# Altium PCB STM32F103C8T6核心板.PcbDoc
Units mil, origin at the board's own origin, x right, y up, seen from the top; angles counter-clockwise.
Board outline 2100 x 900 mil, 2 copper layers (Top Layer, Bottom Layer); 35 components, 50 nets, 170 pads, 27 vias.
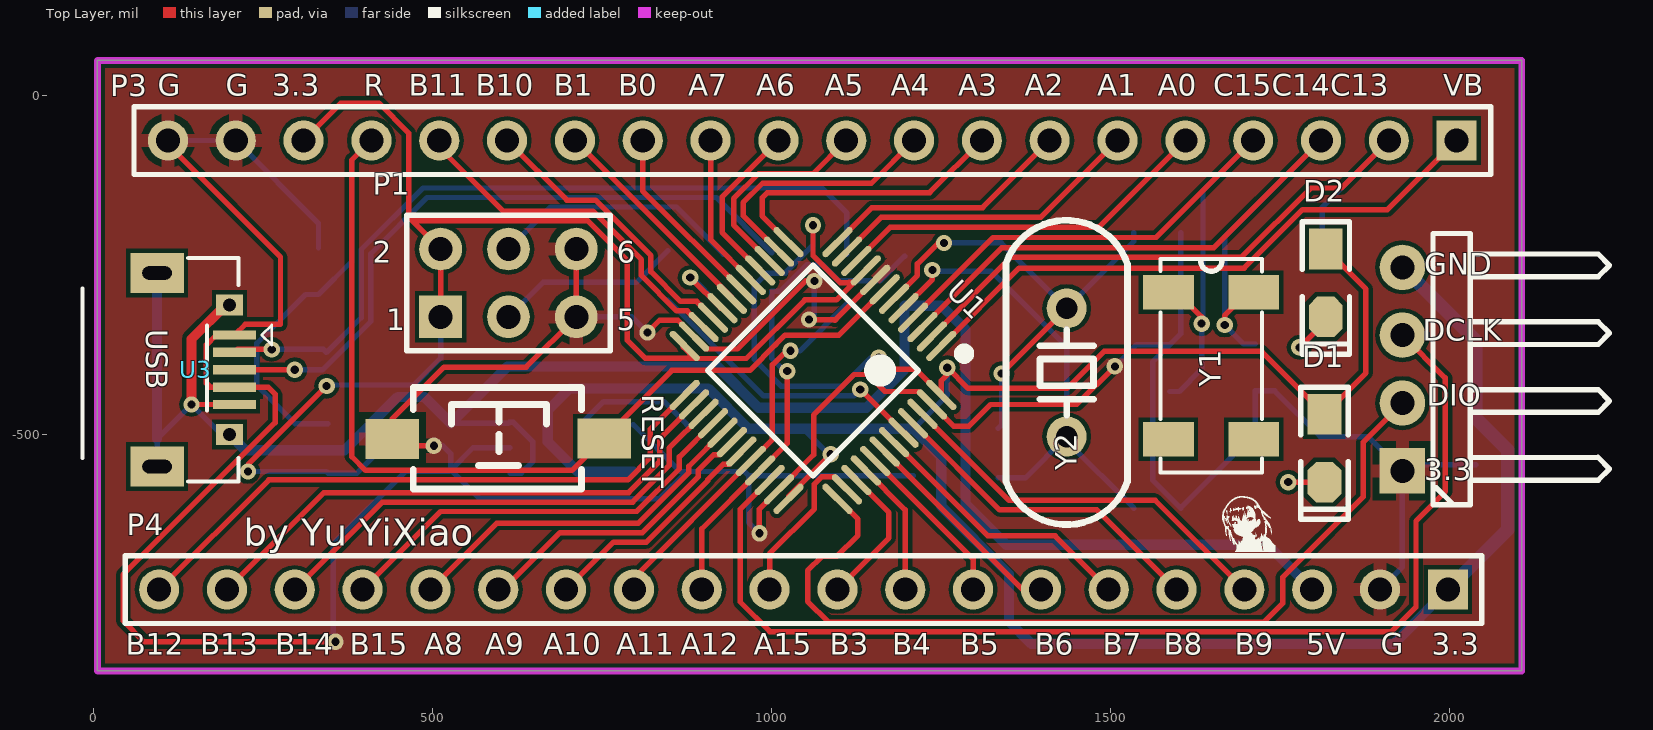
[diagram p0: Top Layer view]
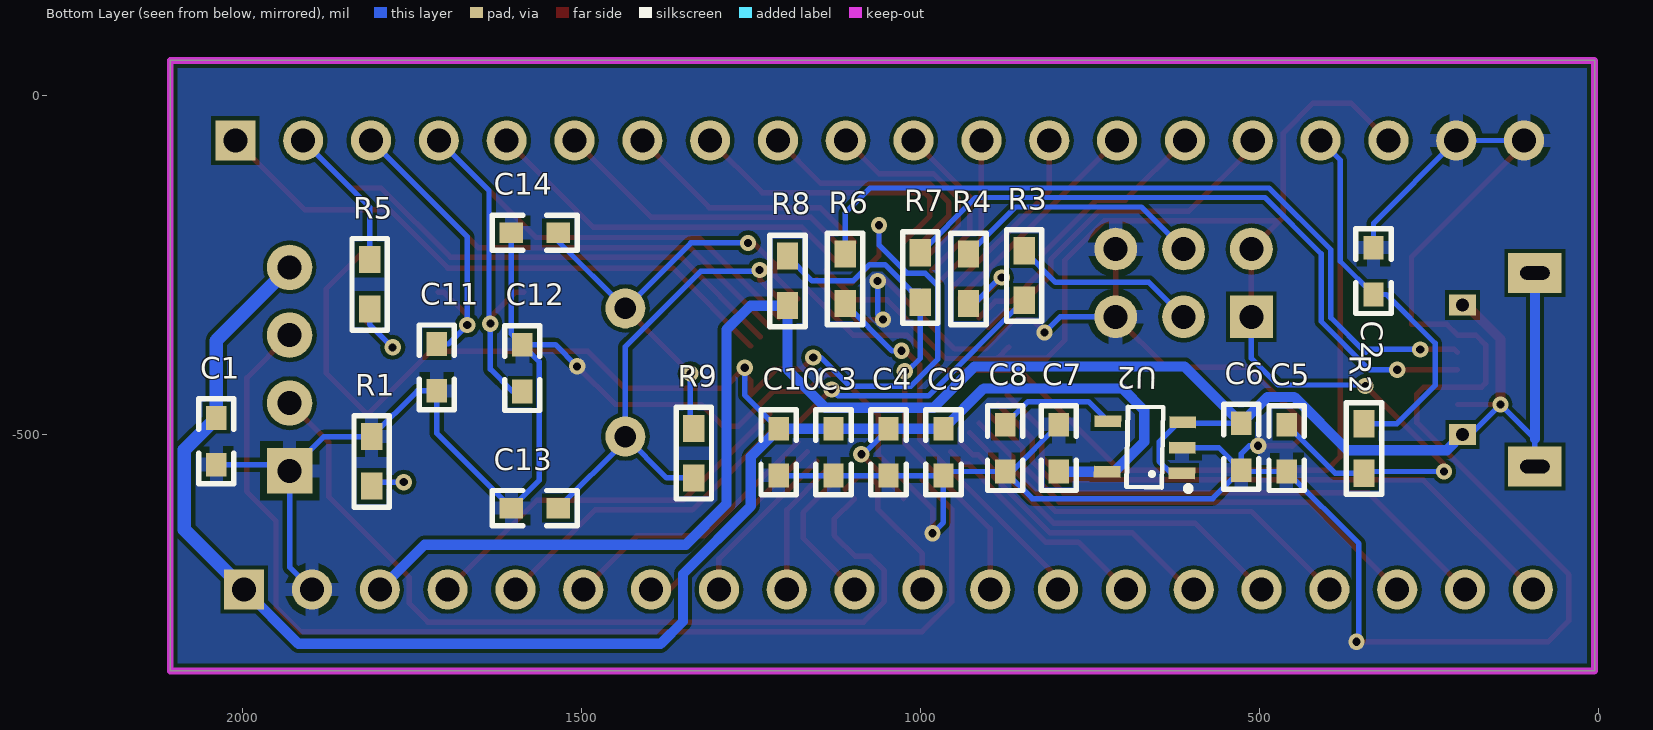
[diagram p1: Bottom Layer view, seen from below]

## Layer stack, top to bottom
Top Solder: solder mask 0.4, Solder Resist, Dk 3.5
Top Layer: signal copper 1.4
Dielectric1: dielectric 12.6, FR-4, Dk 4.8
Bottom Layer: signal copper 1.4
Bottom Solder: solder mask 0.4, Solder Resist, Dk 3.5

## Board outline
788,-848 2106,-848 2106,-146 2106,52 7,52 6,52 6,23 6,-848 337,-848

## Design rules (kind name [scope] priority, off if disabled: settings)
Clearance [All] p1: gap=6 ignorepadtopadclearanceinfootprint=FALSE except(0: Arc-Hole Track-Hole SMDPad-Hole THPad-Hole Via-Hole Fill-Hole Poly-Hole Region-Hole Text-Hole)
FabricationTestPointUsage TestPointUsage [All] p1: valid=0 allowmultiple=FALSE
FabricationTestpoint Testpoint [(IsPad And (OnTopLayer Or OnBottomLayer))] p1: side=3 testpointundercomponent=TRUE minsize=40 maxsize=100 preferedsize=60 minholesize=0 maxholesize=40 preferedholesize=32 testpointgrid=1 allowsidetop=TRUE allowsidebottom=TRUE usegrid=TRUE gridtolerance=0.01
HoleToHoleClearance [All] p1: gap=0 allowstackedmicrovias=TRUE
MinimumSolderMaskSliver [All] p1: minsoldermaskwidth=0
PolygonConnect PolygonConnect_1 [All vs (InPadClass('All Pads'))] p1: connectstyle=Relief reliefconductorwidth=20 reliefentries=4 polygonreliefangle="90 Angle" airgapwidth=10
PolygonConnect [All] p2: connectstyle=Direct reliefconductorwidth=20 reliefentries=4 polygonreliefangle="90 Angle" airgapwidth=10
RoutingVias [All] p1: holewidth=12 width=24 viastyle="Through Hole" minholewidth=12 minwidth=24 maxholewidth=50 maxwidth=100
SilkToSilkClearance [All] p1: silktosilkclearance=0
SilkToSolderMaskClearance SilkscreenOverComponentPads [IsPad] p1: minsilkscreentomaskgap=0 clearancetoexposedcopper=TRUE
SolderMaskExpansion [All] p1: expansion=4 istentingtop=FALSE
Width [All] p1: maxlimit=20 minlimit=6 preferedwidth=8
24 further rules are at their usual default settings.

## Components (designator, comment, footprint, x,y, rotation, side; value= is the part's Value field where it differs from the comment)
C1 "104,0603" "C 0603" 2038,-509 r90 bottom
C2 "105,0603" "C 0603" 332,-259 r270 bottom
C3 "105,0603" "C 0603" 1128,-525 r90 bottom
C4 "105,0603" "C 0603" 1047,-525 r90 bottom
C5 "106,0603" "C 0603" 460,-520 r270 bottom
C6 "105,0603" "C 0603" 527,-517 r90 bottom
C7 "104,0603" "C 0603" 796,-520 r270 bottom
C8 "223,0603" "C 0603" 875,-519 r90 bottom
C9 "105,0603" "C 0603" 966,-525 r90 bottom
C10 "105,0603" "C 0603" 1209,-525 r90 bottom
C11 "22P,0603" "C 0603" 1713,-401 r270 bottom
C12 "22P,0603" "C 0603" 1587,-401 r90 bottom
C13 "22P,0603" "C 0603" 1569,-608 r0 bottom
C14 "22P,0603" "C 0603" 1569,-202 r0 bottom
D1 "LED" "LED 0805G" 1815,-519.68 r270 top
D2 "LED" "LED 0805G" 1817,-276 r270 top
P1 "Header 3X2" HDR-3X2 512,-326 r0 top
P2 "SWD" HDR-1X4_H 1930,-553 r90 top
P3 "Header 20" HDR1X20 2010,-66 r180 top
P4 "Header 20" HDR1X20 1997,-728 r180 top
R1 "510R,0603" "R 0603" 1809,-539 r90 bottom
R2 "10K,0603" "R 0603" 346,-520 r270 bottom
R3 "10K,0603" "R 0603" 847,-265 r90 bottom
R4 "10K,0603" "R 0603" 929,-270 r270 bottom
R5 "510R,0603" "R 0603" 1812,-278 r90 bottom
R6 "20R,0603" "R 0603" 1111,-270 r270 bottom
R7 "20R0603" "R 0603" 1000,-268 r270 bottom
R8 "4.7K,0603" "R 0603" 1196,-273 r90 bottom
R9 "1M0603" "R 0603" 1334,-527 r270 bottom
RESET "SW-PB_V" "TSW SMD-3*6*2.5" 598,-505 r0 top (schematic designator SW1)
U1 "STM32F103C8T6" "TQFP48 7x7_L" 1061,-405 r135 top locked
U2 "RT9193" SOT23-5L 669,-518 r91 bottom
U3 "USB-mrico" USB-micro_B 94,-404 r270 top
Y1 "32.768K" MC-306 1648,-398 r270 top
Y2 "8M" "XTAL-49S DIP" 1435,-408 r270 top

## Footprints (in the part's own frame and the unit in brackets; to place one, negate y for a bottom-side part, rotate by r counter-clockwise, add the part's x,y. Pads: shape width x height; smd on the part's side, far side on the other; paste and mask are expansions set on the pad)
"C 0603" [mil] "无极性贴片电容"
  rect 35x30 smd: 1(-35,0) 2(34,0)
  silkscreen extent -63,-26 62,26, body extent -31,-16 31,16, height 32
HDR1X20 [mm] "Connector; Header; 20 Position"
  rect 1.5x1.5 hole 0.9: 1(0,0)
  round 1.5 hole 0.9: 2(2.54,0) 3(5.08,0) 4(7.62,0) 5(10.16,0) 6(12.7,0) 7(15.24,0) 8(17.78,0) 9(20.32,0) 10(22.86,0) 11(25.4,0) 12(27.94,0) 13(30.48,0) 14(33.02,0) 15(35.56,0) 16(38.1,0) 17(40.64,0) 18(43.18,0) 19(45.72,0) 20(48.26,0)
  silkscreen extent -1.27,-1.27 49.53,1.27
HDR-1X4_H [mm] "弯脚排针，4脚"
  rect 1.7x1.7 hole 0.9: 1(0,0)
  round 1.7 hole 0.9: 2(2.54,0) 3(5.08,0) 4(7.62,0)
  silkscreen extent -1.27,-7.76 8.89,-1.14, body extent -1.27,-7.77 8.89,1.27, height 4.85
HDR-3X2 [mm] "双排排针，3x2脚"
  rect 1.6x1.6 hole 0.9: 1(0,0)
  round 1.6 hole 0.9: 2(0,2.54) 3(2.54,0) 4(2.54,2.54) 5(5.08,0) 6(5.08,2.54)
  silkscreen extent -1.27,-1.27 6.35,3.81, body extent -1.27,-1.27 6.35,3.81, height 8.5
"LED 0805G" [mil] "绿色0805LED"
  rect 60x50 smd: 1(-50,0)
  oct 60x50 smd: 2(50,0)
  silkscreen extent -90,-35 105,35, body extent -39,-25 39,25, height 32
MC-306 [mm]
  rect 1.3x1.9 smd: 1(-2.75,-1.6) 2(2.75,-1.6) 3(2.75,1.6) 4(-2.75,1.6)
  silkscreen extent -4,-1.9 4,1.9
"R 0603" [mil] "1/10W贴片电阻"
  rect 40x31.5 smd: 1(-36.5,0) 2(36.5,0)
  silkscreen extent -68,-26 68,26, body extent -31,-16 31,16, height 16
SOT23-5L [mm] "3x1.6x1.1mm(长宽高)"
  rect 0.45x1 smd: 1(-0.95,-1.4) 2(0,-1.4) 3(0.95,-1.4) 4(0.95,1.4) 5(-0.95,1.4)
  silkscreen extent -1.6,-1.73 1.5,0.66, body extent -1.5,-1.4 1.5,1.4, height 1.15
"TQFP48 7x7_L" [mm] "48脚，体宽：7x7mm, 脚距：0.5mm"
  oval 0.25x1.5 smd: 1(-2.75,-4.046) 2(-2.25,-4.046) 3(-1.75,-4.046) 4(-1.25,-4.046) 5(-0.75,-4.046) 6(-0.25,-4.046) 7(0.25,-4.046) 8(0.75,-4.046) 9(1.25,-4.046) 10(1.75,-4.046) 11(2.25,-4.046) 12(2.75,-4.046) 25(2.75,4.046) 26(2.25,4.046) 27(1.75,4.046) 28(1.25,4.046) 29(0.75,4.046) 30(0.25,4.046) 31(-0.25,4.046) 32(-0.75,4.046) 33(-1.25,4.046) 34(-1.75,4.046) 35(-2.25,4.046) 36(-2.75,4.046)
  oval 1.5x0.25 smd: 13(4.046,-2.75) 14(4.046,-2.25) 15(4.046,-1.75) 16(4.046,-1.25) 17(4.046,-0.75) 18(4.046,-0.25) 19(4.046,0.25) 20(4.046,0.75) 21(4.046,1.25) 22(4.046,1.75) 23(4.046,2.25) 24(4.046,2.75) 37(-4.046,2.75) 38(-4.046,2.25) 39(-4.046,1.75) 40(-4.046,1.25) 41(-4.046,0.75) 42(-4.046,0.25) 43(-4.046,-0.25) 44(-4.046,-0.75) 45(-4.046,-1.25) 46(-4.046,-1.75) 47(-4.046,-2.25) 48(-4.046,-2.75)
  silkscreen extent -3.68,-4.57 2.79,2.79, body extent -4.5,-4.5 4.5,4.5, height 1.05
"TSW SMD-3*6*2.5" [mm] "3*6*2.5mm"
  rect 2x1.5 smd: 1(-3.996,-0.02) 2(3.937,0)
  silkscreen extent -3.21,-1.9 3.09,1.9, body extent -4,-1.88 4,1.62, height 2.59
USB-micro_B [mm] "micro型USB ，5.7*7.8*2.5mm"
  rect 0.35x1.6 smd: 1(-1.3,2.9) 2(-0.65,2.9) 3(0,2.9) 4(0.65,2.9) 5(1.3,2.9)
  rect 1.5x2 hole 0.5 slot 1.1 at 90 deg: 5(-3.625,0) 5(3.625,0)
  rect 0.8x1 hole 0.5: 5(-2.425,2.71) 5(2.425,2.71)
  silkscreen extent -4.19,-2.79 4.19,4.3, body extent -4,-2.71 4,2.89, height 2.8
"XTAL-49S DIP" [mm]
  round 1.5 hole 0.8: 1(-2.4,0) 2(2.4,0)
  silkscreen extent -5.7,-2.28 5.7,2.28, body extent -5.68,-2.35 5.68,2.3, height 3.5

## Part data
C1 C2 C3 C4 C5 C6 C7 C8 C9 C10 C11 C12 C13 C14: library part Cap, "Capacitor"
P1: "Header, 3-Pin, Dual row"
P2: library part "Header 4", "Header, 4-Pin"
P3 P4: "Header, 20-Pin"
R1 R2 R3 R4 R5 R6 R7 R8 R9: library part Res2, "Resistor"
RESET: "SWITCH"
U2: library part RT9193X_5P
U3: library part usb-STM
Y1 Y2: library part XTAL, "Crystal Oscillator"

## Via types
v1: diameter 24, hole 12, Top Layer to Bottom Layer, 27 vias

## Nets (pads, with @x,y where several pads share a name; then routed paths per layer and width w, separated by ;. In a path a pad name is that pad's centre, name@x,y a point inside that pad or via, vN(x,y) a via of type N, cw(c..) or ccw(c..) an arc to the next point about the centre after c; other vN are vias at no path point)
5V: C6.2 P4.3 R8.1 U2.1 U2.3 U3.5 | length 3027.2
  Top Layer w8: v1(144.82,-455.18) U3.5@208.17,-455.18
  Top Layer w15: v1(144.82,-455.18) 144.82,-358.7 194.99,-308.53 U3.5@200.69,-308.53
  Bottom Layer w8: U3.5@94,-546.72 94,-506 v1(144.82,-455.18) 189.11,-499.47 U3.5@200.69,-499.47 ; C6.2 611.8,-483 U2.3 619.37,-481.57 648,-510.2 648,-539 630.64,-556.36 U2.1
  Bottom Layer w15: 94,-506 U3.5@94,-261.28 ; U3.5@200.69,-499.47 223.94,-522.72 370.28,-522.72 449,-444 488,-444 C6.2 611,-399 919.75,-399 980.75,-460 1139.82,-460 1196,-403.82 R8.1 1250.5,-309.5 1286,-345 1286,-602 1346,-662 1731,-662 P4.3
BOOT0: R3.1 U1.44 | length 436.3
  Top Layer w8: v1(1130.76,-433) U1.44
  Bottom Layer w8: R3.1 988,-442.5 1121.26,-442.5 v1(1130.76,-433)
BOOT1: R4.2 U1.20 | length 134.7
  Top Layer w8: v1(880,-268) 925.24,-313.24 U1.20
  Bottom Layer w8: v1(880,-268) 882.5,-268 922,-307.5 924.87,-310.48 R4.2@929,-314.76
GND: C1.1 C2.1 C3.1 C4.1 C5.2 C6.1 C7.1 C8.1 C9.1 C10.1 C11.2 C12.2 C13.2 C14.2 P1.5 P1.6 P2.1 P3.19 P3.20 P4.2 R1.2 RESET.1 U1.8 U1.23 U1.35 U1.47 U2.2 U3.1 U3.4 | length 6328.7
  Top Layer w8: P3.20 110,-72 276,-238 276,-337 223.99,-337 U3.1 181.24,-352.82 166.68,-367.38 166.68,-423.68 172.59,-429.59 U3.4 257.59,-429.59 268,-440 268,-482 44,-706 44,-774 75,-805 v1(357,-805) ; v1@501,-517 v1(502,-516) 452.9,-516 451.9,-517 RESET.1 440.69,-476.31 517,-400 638,-400 P1.5 P1.6 ; v1(817,-349) 835,-331 861.73,-331 U1.23 904.13,-373.4 949.6,-373.4 1050,-273 v1(1063,-273) ; v1(982,-645) 982,-609.27 U1.35 1062,-529.27 1062,-470.65 1121.65,-411 1142,-411 1167,-436 1217.28,-436 U1.47 1268.28,-487 1291,-487 1322.82,-455.18 1449.82,-455.18 v1(1506,-399) ; v1(1055,-330) 1094.24,-330 ; 1093.24,-331 1094.24,-330 ; U1.8 1094.24,-330
  Bottom Layer w8: P3.20 P3.19 332,-188 C2.1 ; v1(357,-805) 353.54,-801.54 353.54,-660.46 C5.2 525,-554 C6.1 ; v1(502,-516) 515,-516 527,-528 C6.1 ; U2.2 560.04,-518.96 C6.1 ; P1.5 794,-326 v1(817,-349) ; C7.1 865,-554 C8.1 ; v1(982,-645) 966,-629 C9.1 ; v1(1055,-330) 1063,-322 v1(1063,-273) ; C10.1 C3.1 C4.1 C9.1 ; v1(1506,-399) 1538,-367 C12.2 ; C14.2 1603,-351 C12.2 ; P4.2 1930,-695 P2.1 ; C1.1 1939,-544 P2.1 ; C6.1 569,-594 835,-594 C8.1 ; C8.1 960,-554 C9.1 ; C12.2 1562,-392 1562,-567 C13.2 1713,-498 C11.2 1741.5,-435 R1.2 1879.5,-502.5 P2.1
NetC8_2: C8.2 U2.4 | length 177.5
  Bottom Layer w8: U2.4 752.1,-451 841,-451 C8.2
NetD1_2: D1.2 R1.1 | length 103.1
  Top Layer w8: v1(1761.68,-569.68) D1.2
  Bottom Layer w8: v1(1761.68,-569.68) 1803.18,-569.68 R1.1
NetD2_2: D2.2 R5.1 | length 131.7
  Top Layer w8: v1(1778,-371) 1817,-332 D2.2
  Bottom Layer w8: v1(1778,-371) 1812,-337 R5.1
NetP1_3: P1.3 R3.2 | length 275.4
  Bottom Layer w8: P1.3 663,-275 800.5,-275 R3.2
NetP1_4: P1.4 R4.1 | length 371.5
  Bottom Layer w8: P1.4 674,-164 859.5,-164 R4.1
NetR6_1: R6.1 U3.2 | length 1141.3
  Top Layer w8: U3.2 212.58,-374 v1(263,-374)
  Bottom Layer w8: v1(263,-374) 339.18,-374 343.59,-378.41 395,-327 395,-227 486,-136 1074,-136 1111,-173 R6.1
NetR7_1: R7.1 U3.3 | length 989.3
  Top Layer w8: U3.3 v1(297,-404)
  Bottom Layer w8: v1(297,-404) 337.8,-404 409,-332.8 409,-233 492,-150 918.5,-150 R7.1
OSCIN: C13.1 R9.2 U1.5 Y2.2 | length 723.1
  Top Layer w8: U1.5 1237,-270.76 v1(1237,-257)
  Bottom Layer w8: v1@1237,-259 1324,-259 1435,-370 Y2.2 ; R9.2 1373.99,-563.5 Y2.2 ; C13.1 1435,-509 Y2.2
OSCOUT: C14.1 R9.1 U1.6 Y2.1 | length 709.8
  Top Layer w8: U1.6 1215,-264.92 1215,-247.89 1245.89,-217 v1(1254,-217) ; v1(1339,-409.51) Y2.1
  Bottom Layer w8: v1(1254,-217) 1338.49,-217 Y2.1 1534,-214.51 C14.1 ; R9.1 1339,-485.5 v1(1339,-409.51)
PA0: P3.5 U1.10 | length 558.7
  Top Layer w8: U1.10 1174.56,-194 1482,-194 P3.5
PA1: P3.6 U1.11 | length 466.8
  Top Layer w8: U1.11 1161.73,-179 1397,-179 P3.6
PA2: P3.7 U1.12 | length 375
  Top Layer w8: U1.12 1147.89,-165 1311,-165 P3.7
PA3: P3.8 U1.13 | length 440.3
  Top Layer w8: U1.13 986.06,-176.94 986.06,-150.66 993.72,-143 1233,-143 P3.8
PA4: P3.9 U1.14 | length 384
  Top Layer w8: U1.14 958,-176.73 958,-157.6 986.6,-129 1147,-129 P3.9
PA5: P3.10 U1.15 | length 315.4
  Top Layer w8: U1.15 944,-190.56 944,-151.8 980.8,-115 1061,-115 P3.10
PA6: P3.11 U1.16 | length 249.2
  Top Layer w8: U1.16 927,-201.4 927,-149 P3.11
PA7: P3.12 U1.17 | length 230
  Top Layer w8: P3.12 910,-212.24 U1.17
PA8: P4.16 U1.29 | length 531.8
  Top Layer w8: P4.16 595,-630 803.71,-630 878,-555.71 878,-546.24 U1.29
PA9: P4.15 U1.30 | length 440
  Top Layer w8: P4.15 604,-728 688,-644 809.51,-644 892,-561.51 892,-552.04 914.96,-529.08 923,-529.08 U1.30
PA10: P4.14 U1.31 | length 343.4
  Top Layer w8: P4.14 767,-658 815.31,-658 906,-567.31 906,-565.88 928.88,-543 936.92,-543 U1.31
PA11: P4.13 R6.2 U1.32 | length 563.1
  Top Layer w8: P4.13 797,-710.76 U1.32 1001,-506.76 1001,-396.89 1021.89,-376 v1(1028,-376)
  Bottom Layer w8: v1(1028,-376) 1041.5,-376 R6.2
PA12: P4.12 R7.2 R8.2 U1.33 | length 741.3
  Top Layer w8: P4.12 897,-638.6 U1.33 1023,-512.6 v1(1023,-406)
  Bottom Layer w8: v1(1023,-406) 1019,-406 1000,-387 R7.2 1000,-288 1013.19,-288 1052.19,-249 1075,-249 1099,-273 1159.5,-273 R8.2
PA15: P4.11 U1.38 | length 242.9
  Top Layer w8: P4.11 997,-675 1063,-609 1063,-572.37 1073.5,-561.87 1092.6,-561.87 U1.38
PB0: P3.13 U1.18 | length 279.6
  Top Layer w8: P3.13 810,-140.08 U1.18
PB1: P3.14 U1.19 | length 329.2
  Top Layer w8: P3.14 941.4,-297.4 U1.19
PB3: P4.10 U1.39 | length 213
  Top Layer w8: P4.10 1173,-652 1173,-614.44 U1.39
PB4: P4.9 U1.40 | length 199.7
  Top Layer w8: U1.40 1197,-610.6 P4.9
PB5: P4.8 U1.41 | length 249.2
  Top Layer w8: U1.41 1297,-682.76 P4.8
PB6: P4.7 U1.42 | length 314.6
  Top Layer w8: U1.42 1370.08,-728 P4.7
PB7: P4.6 U1.43 | length 406.4
  Top Layer w8: U1.43 1318.92,-649 1418,-649 P4.6
PB8: P4.5 U1.45 | length 490.1
  Top Layer w8: U1.45 1336.19,-610.6 1479.6,-610.6 P4.5
PB9: P4.4 U1.46 | length 582
  Top Layer w8: U1.46 1350.03,-596.6 1565.6,-596.6 P4.4
PB10: P3.15 U1.21 | length 425.6
  Top Layer w8: P3.15 698,-154 740.4,-154 822,-235.6 822,-259.2 865.8,-303 889.4,-303 U1.21
PB11: P3.16 U1.22 | length 523.3
  Top Layer w8: P3.16 510,-76 604,-170 736.6,-170 808,-241.4 808,-265 860,-317 875.56,-317 U1.22
PB12: P4.20 U1.25 | length 918
  Top Layer w8: P4.20 258.65,-566.35 788.16,-566.35 821,-533.52 821,-491.89 U1.25
PB13: P4.19 U1.26 | length 821.5
  Top Layer w8: P4.19 340,-585 789.31,-585 835,-539.31 835,-505.73 U1.26
PB14: P4.18 U1.27 | length 724.9
  Top Layer w8: P4.18 426,-599 795.11,-599 849,-545.11 849,-519.56 U1.27
PB15: P4.17 U1.28 | length 628.4
  Top Layer w8: P4.17 512,-613 800.91,-613 864,-549.91 864,-532.4 U1.28
PC13: P3.2 R5.2 U1.2 | length 1009.5
  Top Layer w8: U1.2 1353.27,-238 1693,-238 1795,-136 1840,-136 P3.2
  Bottom Layer w8: R5.2 1812,-164 P3.2
PC14: C11.1 P3.3 U1.3 Y1.4 | length 1160.2
  Top Layer w8: U1.3 1339.44,-224 1652,-224 P3.3 ; v1(1668,-338) 1668,-324 1702.27,-289.73 Y1.4
  Bottom Layer w8: C11.1 1696,-366 v1(1668,-338) 1668,-208 P3.3
PC15: C12.1 P3.4 U1.4 Y1.1 | length 1113
  Top Layer w8: U1.4 1326.6,-209 1567,-209 P3.4 ; Y1.1 1597.73,-289.73 1634,-326 v1(1634,-336)
  Bottom Layer w8: C12.1 1601.11,-436 1634,-403.11 v1(1634,-336) 1636,-334 1636,-140 P3.4
RESET: C2.2 P3.17 R2.1 RESET.2 U1.7 | length 1953.4
  Top Layer w8: P3.17 381,-95 381,-532 401.35,-552.35 705.65,-552.35 RESET.2 853,-405 968,-405 1006,-367 1006,-366.89 1019.89,-353 1099.08,-353 U1.7
  Bottom Layer w8: R2.1 297.5,-483.5 241,-427 241,-364.89 312.89,-293 C2.2 381,-244 381,-95 P3.17
SWDCLK: P2.2 U1.37 | length 1300.4
  Top Layer w8: U1.37 1127,-624.11 1127,-648 1096,-679 1074,-679 1053,-700 1053,-745.47 1083.53,-776 1726,-776 1753.54,-748.46 1753.54,-738.85 1753.54,-710 1872,-591.53 1872,-511 P2.2
SWDIO: P2.3 U1.34 | length 1672.6
  Top Layer w8: U1.34 953.54,-609.9 953.54,-746 997.53,-790 1914,-790 1950,-754 1950,-627 1993.5,-583.5 1993,-583 1993,-416 P2.3
VBAT: P3.1 U1.1 | length 885.3
  Top Layer w8: U1.1 1364.97,-254.14 1696.66,-254.14 1782.8,-168 1908,-168 P3.1
VCC3V3: C1.2 C3.2 C4.2 C5.1 C7.2 C9.2 C10.2 D1.1 D2.1 P1.1 P1.2 P2.4 P3.18 P4.1 R2.2 U1.9 U1.24 U1.36 U1.48 U2.5 | length 6376.1
  Top Layer w8: v1(228,-554) 228,-544 v1(344,-428) ; P3.18 365,-11 421,-11 465,-55 465,-179 470.5,-184.5 ; P1.1 P1.2 470.5,-184.5 ; U1.24@869.96,-370.76 U1.24@886.52,-387.32 ; U1.36 1024.92,-590.65 v1(1087,-528.57) ; v1(1061,-191) 1061,-235.63 1101.34,-275.97 1114.67,-275.97 1114.67,-275 U1.9@1121.4,-275 ; U1.9 U1.9@1121.4,-275 ; v1(1158,-386) 1175,-403 1212.11,-403 U1.48 1250.19,-419.81 1259,-411 v1(1259,-401) 1289.51,-431.51 1435.49,-431.51 1490,-377 1722.32,-377 D1.1 1876,-408.68 1876,-285 D2.1 ; 470.5,-184.5 729.19,-184.5 787,-242.32 787,-360.32 814,-387.32 U1.24@886.52,-387.32 ; U1.24@886.52,-387.32 886.6,-387.4 962.6,-387.4 1049,-301 1095.4,-301 U1.9@1121.4,-275
  Bottom Layer w8: v1(228,-554) 343.5,-554 R2.2 388.5,-556.5 C5.1 ; v1(344,-428) 345.5,-426.5 472.5,-426.5 512,-387 P1.1 ; C4.2 1084.57,-528.57 v1(1087,-528.57) ; v1(1061,-191) 1061,-220.39 1019.89,-261.5 993.11,-261.5 974.25,-280.36 974.25,-388.36 1013.89,-428 1104.65,-428 1146.65,-386 v1(1158,-386) ; C10.2 1259,-441 v1(1259,-401)
  Bottom Layer w15: C7.2 795.57,-554.43 U2.5 714.43,-554.43 670,-510 670,-464 702.59,-431.41 906.41,-431.41 C9.2 C4.2 C3.2 C10.2 1250,-532 1250,-605 1350.04,-705.04 1350.04,-775.04 1383,-808 1917,-808 P4.1
  Bottom Layer w20: P2.4 2038,-361 C1.2 2085,-522 2085,-640 P4.1
pads on no net: Y1.2 Y1.3

## Polygon pours and split planes (outlines as drawn)
GND on Top Layer "GND_L01_P-001" (solid, remove dead copper, pour order 0): -93,109 -51,67 -51,-954 2191,-954 2233,-912 2202,-881 2202,122
GND on Bottom Layer "GND_L01_P-001" (solid, remove dead copper, pour order 4): -140,192 -51,103 -51,-1073 2100,-1073 2300,-873 2300,170

## Keep-outs
Keep-Out Layer:
  lines w10: 6,-848 6,52 ; 7,-848 2105,-848 ; 7,52 2105,52 ; 2106,-848 2106,-798 2106,-398 2106,52

## Silkscreen, mask and mechanical layers (free items; w line width, h text height)
Top Overlay:
  drawing of 7613 lines, arcs and shapes, not listed
  text "G" at 95,0 h32
  text "G" at 195,0 h32
  text "3.3" at 264,0 h32
  text "R" at 399,0 h32
  text "B11" at 465,0 h32
  text "B10" at 564,0 h32
  text "B1" at 679,0 h32
  text "B0" at 774,0 h32
  text "A7" at 877,0 h32
  text "A6" at 977,0 h32
  text "A5" at 1078,0 h32
  text "A4" at 1176,0 h32
  text "A3" at 1275.43,0 h32
  text "A2" at 1373.29,0 h32
  text "A1" at 1480,0 h32
  text "A0" at 1569,0 h32
  text "C15C14C13" at 1651,0 h32
  text "VB" at 1990,0 h32
  text "GND" at 1962,-264 h32
  text "DCLK" at 1960,-361 h32
  text "DIO" at 1966,-457 h32
  text "3.3" at 1962,-567 h32
  text "by Yu YiXiao" at 222,-663.67 h40
  text "B12" at 48,-824 h32
  text "B13" at 158,-824 h32
  text "B14" at 268,-824 h32
  text "B15" at 378,-824 h32
  text "A8" at 488,-824 h32
  text "A9" at 578,-824 h32
  text "A10" at 663,-824 h32
  text "A11" at 771,-824 h32
  text "A12" at 866,-824 h32
  text "A15" at 974,-824 h32
  text "B3" at 1086,-824 h32
  text "B4" at 1178,-824 h32
  text "B5" at 1278,-824 h32
  text "B6" at 1388,-824 h32
  text "B7" at 1488,-824 h32
  text "B8" at 1578,-824 h32
  text "B9" at 1683,-824 h32
  text "5V" at 1788,-824 h32
  text "G" at 1898,-824 h32
  text "3.3" at 1973,-824 h32

## Text inside footprints (layer, text, board x,y; h text height)
P1: Top Overlay "6" at 772,-246 h32; Top Overlay "5" at 772,-346 h32; Top Overlay "2" at 412,-246 h32; Top Overlay "1" at 432,-346 h32
U3: Top Overlay "USB" at 78.17,-344 h32 r270